# Altium PCB Project2.PcbDoc
Units mil, origin at the board's own origin, x right, y up, seen from the top; angles counter-clockwise.
Board outline 3937.01 x 1968.5 mil, 2 copper layers (Top Layer, Bottom Layer); 57 components, 56 nets, 242 pads, 48 vias.
Unrouted connection lines stored in the file: 7.
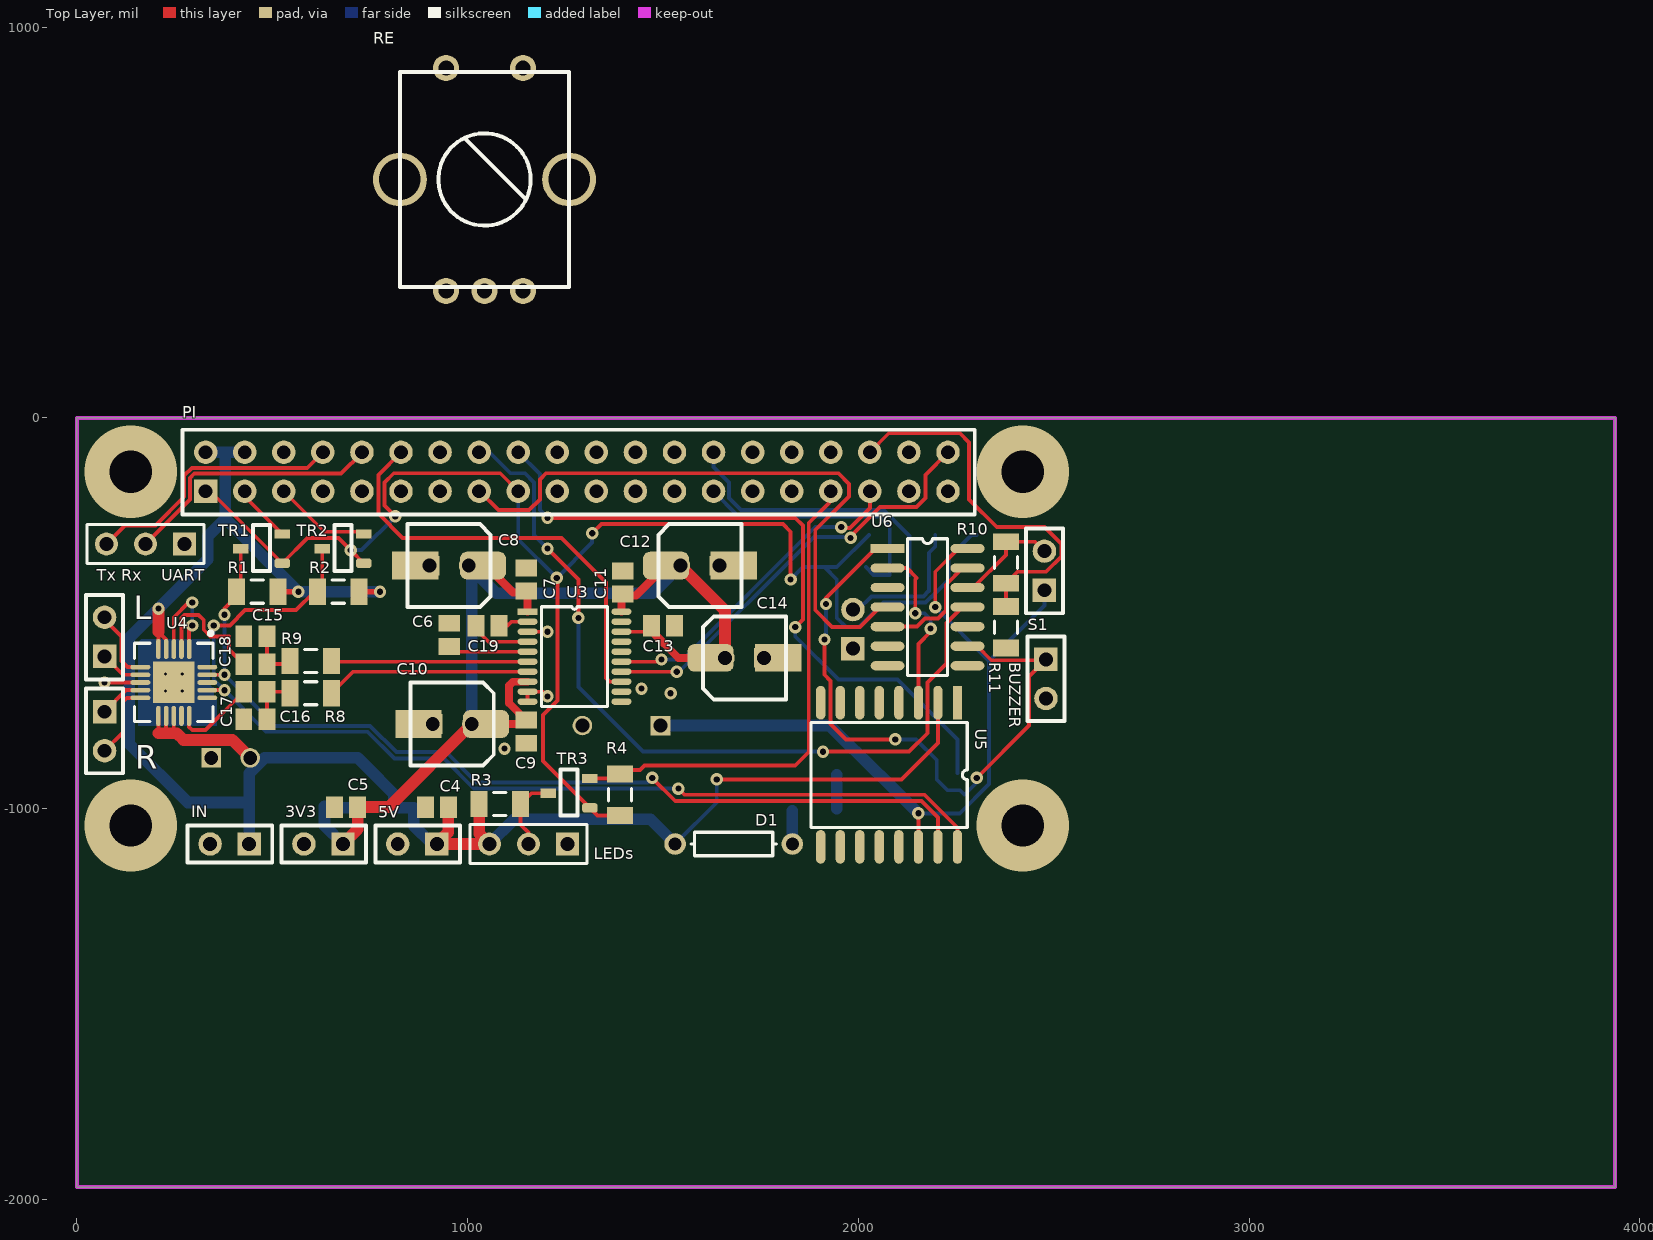
[diagram p0: Top Layer view]
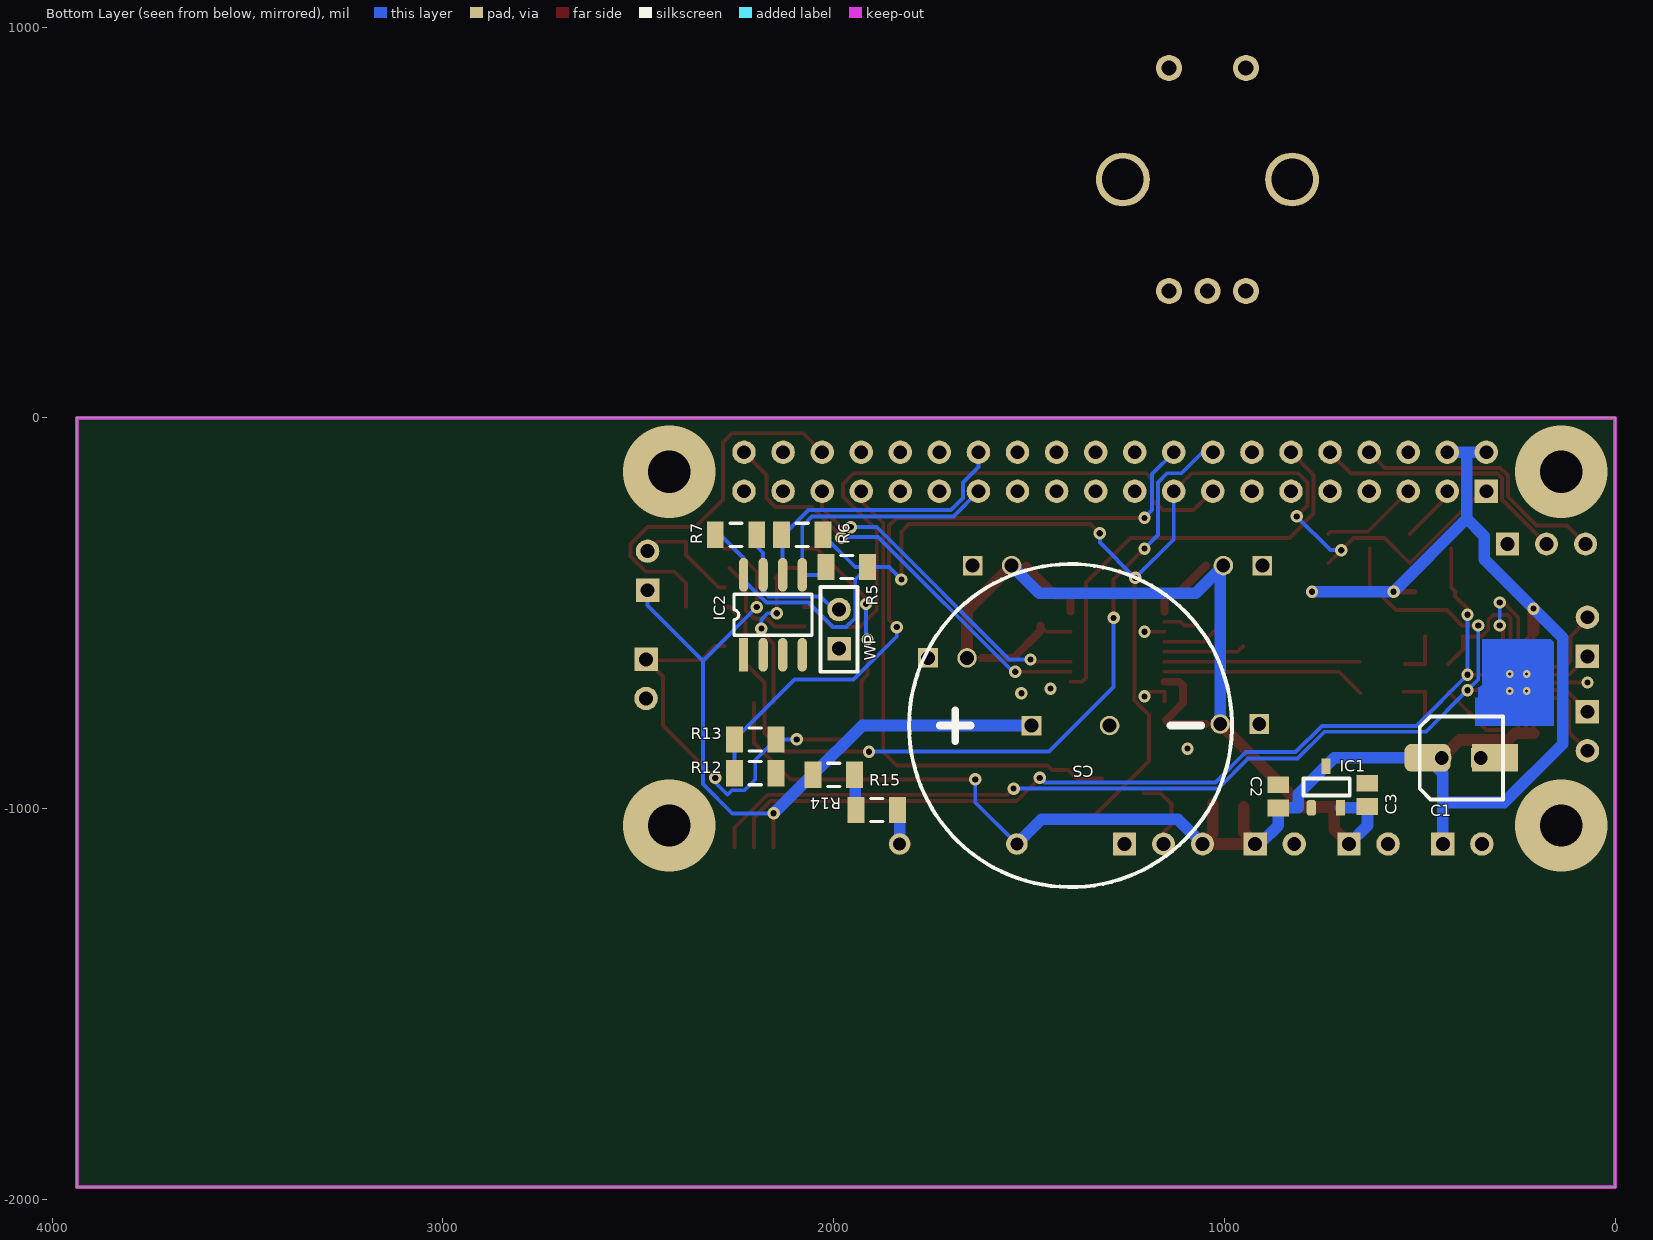
[diagram p1: Bottom Layer view, seen from below]

## Layer stack, top to bottom
Top Solder: solder mask 0.4, Solder Resist, Dk 3.5
Top Layer: signal copper 1.4
Dielectric 1: dielectric 12.6, FR-4, Dk 4.8
Bottom Layer: signal copper 1.4
Bottom Solder: solder mask 0.4, Solder Resist, Dk 3.5

## Board outline
0,-1968.5 0,0 3937.01,0 3937.01,-1968.5

## Design rules (kind name [scope] priority, off if disabled: settings)
Clearance [All] p1: gap=5
PolygonConnect [All] p1: connectstyle=Relief reliefconductorwidth=10 reliefentries=4 polygonreliefangle="90 Angle" airgapwidth=10
RoutingVias [All] p1: holewidth=28 width=50 viastyle="Through Hole" minholewidth=28 minwidth=50 maxholewidth=28 maxwidth=50
SolderMaskExpansion [All] p1: expansion=4
Width [All] p1: maxlimit=50 minlimit=10 preferedwidth=10 minimp=50.000000 maximp=50.000000 favimp=50.000000
30 further rules are at their usual default settings.

## Components (designator, comment, footprint, x,y, rotation, side; value= is the part's Value field where it differs from the comment)
3V3 "" HDR1X2 681.1,-1090.55 r180 top
5V "" HDR1X2 921.26,-1090.55 r180 top
BUZZER "" HDR1X2 2480.32,-618.11 r270 top
C1 "" "SMD CAP 6X5" 393.7,-870.08 r180 bottom
C2 "" C0805 862.2,-968.5 r270 bottom
C3 "" C0805 633.86,-964.57 r270 bottom
C4 "" C0805 921.26,-996.06 r0 top
C5 "" C0805 688.98,-996.06 r180 top
C6 "" C0805 952.76,-555.12 r270 top
C7 "" C0805 1149.61,-413.39 r90 top
C8 "" "SMD CAP 6X5" 952.76,-377.95 r180 top
C9 "" C0805 1149.61,-803.15 r270 top
C10 "" "SMD CAP 6X5" 960.63,-783.46 r180 top
C11 "" C0805 1397.64,-421.26 r270 top
C12 "" "SMD CAP 6X5" 1594.49,-377.95 r0 top
C13 "" C0805 1500,-531.5 r0 top
C14 "" "SMD CAP 6X5" 1708.66,-614.17 r0 top
C15 "" C0805 456.69,-559.06 r180 top
C16 "" C0805 456.69,-771.65 r180 top
C17 "" C0805 456.69,-700.79 r0 top
C18 "" C0805 456.69,-629.92 r0 top
C19 "" C0805 1051.18,-531.5 r180 top
CS "Supercap" SUPERCAP 1393.7,-787.4 r0 bottom
D1 "" AXIAL-0.3 1681.1,-1090.55 r0 top
IC1 "3v3" SOT-23A 740.16,-944.88 r180 bottom
IC2 "I²C SERIAL EEPROM" SOIC-8 2155.51,-503.94 r90 bottom
IN "" HDR1X2 440.94,-1090.55 r180 top
L "" HDR1X2 70.87,-610.24 r90 top
LEDs "WS2812" HDR1X3 1255.91,-1090.55 r180 top
PI "Raspberry Pi v2" HDR2X10 1279.53,-137.8 r90 top
R "" HDR1X2 70.87,-751.97 r270 top
R1 "" C1206 461.65,-444.92 r0 top
R2 "" C1206 669.29,-444.88 r0 top
R3 "" C1206 1082.68,-988.19 r180 top
R4 "" C1206 1389.76,-964.57 r270 top
R5 "" C1206 1966.54,-381.89 r180 bottom
R6 "" C1206 2080.71,-299.21 r180 bottom
R7 "" C1206 2250,-299.21 r0 bottom
R8 "" C1206 598.43,-704.72 r180 top
R9 "" C1206 598.43,-622.05 r180 top
R10 "" C1206 2377.95,-370.08 r90 top
R11 "" C1206 2377.95,-535.43 r90 top
R12 "" C1206 2200.79,-909.45 r0 bottom
R13 "" C1206 2200.79,-822.83 r0 bottom
R14 "" C1206 1889.76,-1003.94 r0 bottom
R15 "" C1206 2000,-913.39 r0 bottom
RE "RotaryEncoder" EC11E-WP 1043.31,610.24 r0 top
S1 "Alarm reset" HDR1X2 2476.38,-440.94 r90 top
TR1 "Level shifter" SOT-23A 472.44,-334.65 r90 top
TR2 "Level shifter" SOT-23A 681.1,-334.65 r90 top
TR3 "Level shifter" SOT-23A 1259.84,-960.63 r90 top
U3 "I²S DAC" TSSOP-20 1153.54,-496.06 r0 top
U4 "TPA2016D2" QFN20-TPA2016D2 248.03,-677.17 r270 top
U5 "DS3231 RTC" "DS3231 SO-16" 2078.74,-913.39 r270 top
U6 "NOR gates" SOIC-14 2177.17,-484.25 r0 top
UART "" HDR1X3 275.59,-322.83 r180 top
WP "Jumper" HDR1X2 1986.22,-590.55 r90 bottom

## Footprints (in the part's own frame and the unit in brackets; to place one, negate y for a bottom-side part, rotate by r counter-clockwise, add the part's x,y. Pads: shape width x height; smd on the part's side, far side on the other; paste and mask are expansions set on the pad)
AXIAL-0.3 [mm] "Axial Device, Thru-Hole; 2 Leads; 0.3 in Pin Spacing"
  round 1.4 hole 0.85: 1(-3.81,0) 2(3.81,0)
  silkscreen extent -2.77,-0.76 2.77,0.76
C0805 [mm] "Chip Capacitor, Body 2.0x1.3mm, IPC High Density"
  rect 1.1x1.4 smd: 1(-0.75,0) 2(0.75,0)
  body extent -1.1,-0.72 1.1,0.72, height 1.4
C1206 [mm] "Chip Capacitor, Body 3.2x1.6mm, IPC High Density"
  rect 1.1x1.7 smd: 1(-1.35,0) 2(1.35,0)
  silkscreen extent -0.4,-0.75 0.4,0.75, body extent -1.7,-0.9 1.7,0.9, height 1.3
"DS3231 SO-16" [mm]
  rect 2.2x0.6 smd: 1(-4.685,4.445)
  oval 2.2x0.6 smd: 2(-4.685,3.175) 3(-4.685,1.905) 4(-4.685,0.635) 5(-4.685,-0.635) 6(-4.685,-1.905) 7(-4.685,-3.175) 8(-4.685,-4.445) 9(4.685,-4.445) 10(4.685,-3.175) 11(4.685,-1.905) 12(4.685,-0.635) 13(4.685,0.635) 14(4.685,1.905) 15(4.685,3.175) 16(4.685,4.445)
  silkscreen extent -3.38,-5.08 3.41,5.08
EC11E-WP [mm] "With push button"
  round 3.5 hole 2.7: 0(-5.5,0) 0(5.5,0)
  round 1.7 hole 1: 1(-2.5,-7.25) 2(0,-7.25) 3(2.5,-7.25) 4(-2.5,7.25) 5(2.5,7.25)
  silkscreen extent -5.5,-7 5.5,7
HDR1X2 [mil] "2 Pin Header"
  rect 60x60 hole 35.43: 1(0,0)
  round 60 hole 35.43: 2(100,0)
  silkscreen extent -59,-47 157,47
HDR1X3 [mm] "Connector; Header; 3 Position"
  rect 1.5x1.5 hole 0.9: 1(0,0)
  round 1.5 hole 0.9: 2(2.54,0) 3(5.08,0)
  silkscreen extent -1.27,-1.27 6.35,1.27
HDR2X10 [mil] "20 pin Header"
  rect 60x60 hole 35.43: 1(-50,950)
  round 60 hole 35.43: 2(50,950) 3(-50,850) 4(50,850) 5(-50,750) 6(50,750) 7(-50,650) 8(50,650) 9(-50,550) 10(50,550) 11(-50,450) 12(50,450) 13(-50,350) 14(50,350) 15(-50,250) 16(50,250) 17(-50,150) 18(50,150) 19(-50,50) 20(50,50) 21(-50,-50) 22(50,-50) 23(-50,-150) 24(50,-150) 25(-50,-250) 26(50,-250) 27(-50,-350) 28(50,-350) 29(-50,-450) 30(50,-450) 31(-50,-550) 32(50,-550) 33(-50,-650) 34(50,-650) 35(-50,-750) 36(50,-750) 37(-50,-850) 38(50,-850) 39(-50,-950) 40(50,-950)
  silkscreen extent -109,-1019 107,1009
QFN20-TPA2016D2 [mm] "QFN, 20-Leads, Body 4,77x4,77mm, Pitch 0,50mm, Thermal Pad 2,70x2,70mm, IPC Low Density"
  rect 2.7x2.7 smd: 0(0,0)
  oct 1.3x0.3 smd: 1(-2.175,1)
  oval 1.3x0.3 smd: 2(-2.175,0.5) 3(-2.175,0) 4(-2.175,-0.5) 5(-2.175,-1) 11(2.175,-1) 12(2.175,-0.5) 13(2.175,0) 14(2.175,0.5) 15(2.175,1)
  oval 0.3x1.3 smd: 6(-1,-2.175) 7(-0.5,-2.175) 8(0,-2.175) 9(0.5,-2.175) 10(1,-2.175) 16(1,2.175) 17(0.5,2.175) 18(0,2.175) 19(-0.5,2.175) 20(-1,2.175)
  silkscreen extent -3.32,-2.55 2.55,2.55, body extent -2.4,-2.4 2.4,2.4, height 0.8
"SMD CAP 6X5" [mm]
  rrect50% 3x1.8 smd: 1(-2.2,0)
  round 1.27 hole 0.9: 1(-1.27,0)
  rect 1.27x1.27 hole 0.9: 2(1.27,0)
  rect 3x1.8 smd: 2(2.2,0)
  silkscreen extent -2.7,-2.7 2.7,2.7
SOIC-8 [mm]
  rect 2.2x0.6 smd: 1(-2.6,1.905)
  oval 2.2x0.6 smd: 2(-2.6,0.635) 3(-2.6,-0.635) 4(-2.6,-1.905) 5(2.6,-1.905) 6(2.6,-0.635) 7(2.6,0.635) 8(2.6,1.905)
  silkscreen extent -1.33,-2.54 1.34,2.54
SOIC-14 [mm]
  rect 2.2x0.6 smd: 1(-2.6,3.81)
  oval 2.2x0.6 smd: 2(-2.6,2.54) 3(-2.6,1.27) 4(-2.6,0) 5(-2.6,-1.27) 6(-2.6,-2.54) 7(-2.6,-3.81) 8(2.6,-3.81) 9(2.6,-2.54) 10(2.6,-1.27) 11(2.6,0) 12(2.6,1.27) 13(2.6,2.54) 14(2.6,3.81)
  silkscreen extent -1.3,-4.44 1.3,4.44
SOT-23A [mm]
  rrect50% 0.6x1 smd: 1(-0.95,-1.35)
  rect 0.6x1 smd: 2(0.95,-1.35) 3(0,1.35)
  silkscreen extent -1.45,-0.55 1.55,0.55
SUPERCAP [mm] "Supercap"
  rect 1.27x1.27 hole 0.9: 1(2.54,0)
  round 1.27 hole 0.9: 2(-2.54,0)
  silkscreen extent -10.5,-10.5 10.5,10.5
TSSOP-20 [mm]
  rect 1.3x0.4 smd: 1(0,0)
  oval 1.3x0.4 smd: 2(0,-0.65) 3(0,-1.3) 4(0,-1.95) 5(0,-2.6) 6(0,-3.25) 7(0,-3.9) 8(0,-4.55) 9(0,-5.2) 10(0,-5.85) 11(6.1,-5.85) 12(6.1,-5.2) 13(6.1,-4.55) 14(6.1,-3.9) 15(6.1,-3.25) 16(6.1,-2.6) 17(6.1,-1.95) 18(6.1,-1.3) 19(6.1,-0.65) 20(6.1,0)
  silkscreen extent 0.9,-6.18 5.2,0.33

## Part data
3V3 5V IN L R: library part "Header 2", "Header, 2-Pin"
BUZZER: library part Bell, "Electrical Bell"
C1 CS: library part "Cap Pol1", "Polarized Capacitor (Radial)"
C2 C3 C4 C5 C6 C7 C9 C11 C13 C15 C16 C17 C18 C19: library part Cap, "Capacitor"
C8 C10 C12 C14: library part "Cap Pol2", "Polarized Capacitor (Axial)"
D1: library part Diode, "Default Diode"
IC1: library part MCP1703, "Power regulator"
LEDs UART: library part "Header 3", "Header, 3-Pin"
PI: library part RaspberryPiV2, "Raspberry Pi v2 Header"
R1 R2 R3 R4 R5 R6 R7 R8 R9 R10 R11 R12 R13 R14 R15: library part Res2, "Resistor"
S1: library part SW-PB, "Switch"
TR1 TR2 TR3: library part AN10441, "Level Shifter"
U3: library part PCM5102A
U4: "I²C Audio Amplifier"
U5: library part DS3231, "RTC"
U6: library part 744002, "Dual 4-input NOR gate"

## Via types
v1: diameter 31.5, hole 15.75, Top Layer to Bottom Layer, tented both sides, 40 vias
v2: diameter 19.68, hole 7.87, Top Layer to Bottom Layer, 4 vias
v3: diameter 236.22, hole 108.27, Top Layer to Bottom Layer, 4 vias

## Nets (pads, with @x,y where several pads share a name; then routed paths per layer and width w, separated by ;. In a path a pad name is that pad's centre, name@x,y a point inside that pad or via, vN(x,y) a via of type N, cw(c..) or ccw(c..) an arc to the next point about the centre after c; other vN are vias at no path point)
3V3: 3V3.1 C3.2 C5.1 C7.1 C8.1 C9.1 C10.1 C11.2 C12.1 C13.1 C14.1 IC1.2 U3.1 U3.8 U3.18 U3.20 | length 2865.6
  Top Layer w10: U3.18 1454.72,-547.24 C13.1
  Top Layer w20: C10.1@1047.24,-783.46 1139.76,-783.46 C9.1 1106.3,-730.31 1106.3,-685.04 1116.14,-675.2 U3.8 ; C8.1@1047.24,-377.95 1116.14,-446.85 1153.54,-446.85 U3.1 ; U3.20 1393.7,-454.72 1431.1,-454.72 C12.1@1507.87,-377.95 ; C13.1 1470.47,-545.28 1539.37,-614.17 C14.1@1622.05,-614.17
  Top Layer w30: 3V3.1 718.5,-1053.15 C5.1 798.03,-996.06 C10.1@1010.63,-783.46 ; C12.1@1544.49,-377.95 1658.66,-492.13 C14.1@1658.66,-614.17
  Bottom Layer w30: C3.2 633.86,-1043.31 3V3.1 ; C3.2@637.8,-998.03 IC1.2 ; C8.1@1002.76,-377.95 C8.1@1010.63,-385.83 ; C10.1@1010.63,-783.46 C8.1@1010.63,-385.83 ; C12.1@1544.49,-377.95 1473.62,-448.82 1073.62,-448.82 C8.1@1010.63,-385.83
3V3PI: IC2.8 PI.1 PI.17 R4.2 R5.2 R6.2 R7.2 TR1.1 TR2.1 TR3.1 | length 3846.1
  Top Layer w10: PI.1 341.34,-187.8 TR1.1 590.55,-307.09 669.29,-307.09 v1(700.79,-338.58) TR2.1 ; v1(814.96,-251.97) 787.4,-224.41 787.4,-165.35 811.02,-141.73 1083.46,-141.73 PI.17 ; v1(1228.35,-409.45) 1230.47,-411.57 1230.47,-723.26 1192.91,-760.82 1192.91,-877.95 TR3.1 1332.68,-1017.72 R4.2 ; v1(1318.9,-295.28) 1342.52,-271.65 1807.09,-271.65 1826.77,-291.34 v1(1826.77,-413.39)
  Bottom Layer w10: v1(700.79,-338.58) 728.35,-338.58 v1(814.96,-251.97) ; PI.17 1129.53,-310.63 v1(1228.35,-409.45) 1318.9,-318.9 v1(1318.9,-295.28) ; v1(1826.77,-413.39) 1858.27,-381.89 R5.2 ; R6.2 1944.88,-381.89 R5.2 ; R7.2 2289.37,-299.21 2230.51,-358.07 IC2.8 2230.51,-415.16 2187.17,-458.5 2186.19,-458.5 2172.25,-472.44 2064.96,-472.44 2001.97,-535.43 1968.5,-535.43 1944.88,-511.81 1944.88,-413.39 R5.2
5V: 5V.1 C1.1 C2.2 C4.2 D1.1 IC1.3 IN.1 LEDs.3 PI.2 PI.4 R1.2 R2.2 R3.2 U4.4 U4.5 U4.11 U4.12 U4.13 U5.2 | length 5058.4
  Top Layer w10: 208.66,-807.09 U4.11 ; U4.5 208.66,-547.24 228.35,-566.93 U4.4 ; 228.35,-807.09 U4.12 ; 248.03,-807.09 U4.13 ; v1(1637.8,-925.2) 2110.24,-925.2 2203.74,-831.69 U5.2
  Top Layer w15: R1.2 v1(566.93,-444.88) ; R2.2 v1(775.59,-444.88)
  Top Layer w30: 208.66,-807.09 248.03,-807.09 255.69,-807.09 272.81,-824.21 397.83,-824.21 C1.1@443.7,-870.08 ; 208.66,-547.24 v1(208.66,-488.19) ; C4.2 950.79,-1061.02 5V.1 LEDs.3 1029.53,-1064.17 R3.2
  Bottom Layer w10: D1.1 1637.8,-983.86 v1(1637.8,-925.2)
  Bottom Layer w30: PI.2 377.95,-87.8 ; PI.4 377.95,-87.8 ; 437.01,-984.25 283.46,-984.25 133.86,-834.65 133.86,-562.99 334.65,-362.2 334.65,-302.36 379.53,-257.48 ; IN.1 440.94,-909.45 480.31,-870.08 718.5,-870.08 IC1.3 811.02,-962.6 811.02,-998.03 C2.2 862.2,-1043.31 909.45,-1090.55 5V.1 ; v1(775.59,-444.88) v1(566.93,-444.88) 379.53,-257.48 ; LEDs.3 1118.9,-1027.56 1468.11,-1027.56 D1.1 ; 377.95,-87.8 379.53,-89.37 379.53,-257.48
5VBCK: CS.1 R15.2 S1.1 U5.14 U6.14 | length 1998.4
  Top Layer w10: U5.14 v1(2153.74,-1012.01) ; v1(2196.85,-484.25) 2196.85,-393.7 2256.3,-334.25 U6.14
  Bottom Layer w10: v1(2153.74,-1012.01) 2259.65,-1012.01 2334.65,-937.01 2334.65,-622.05 ; v1(2196.85,-484.25) 2334.65,-622.05 ; S1.1 2476.38,-480.32 2334.65,-622.05
  Bottom Layer w30: CS.1 1927.17,-787.4 R15.2 2055.12,-913.39 v1(2153.74,-1012.01)
"BCM 16": PI.36 R10.1 R11.2 | length 973.8
  Top Layer w10: PI.36 2077.95,-39.37 2259.84,-39.37 2283.46,-62.99 2283.46,-208.66 2354.33,-279.53 2476.38,-279.53 2519.68,-322.83 2519.68,-354.33 2480.32,-393.7 2407.48,-393.7 R10.1 R11.2
"BCM 17": PI.11
"BCM 22": PI.15 U6.4 | length 1630.3
  Top Layer w10: PI.15 1030.32,-187.8 1078.74,-236.22 1157.48,-236.22 1185.04,-208.66 1185.04,-157.48 1200.79,-141.73 1948.82,-141.73 1976.38,-169.29 1976.38,-200.79 1889.76,-287.4 1889.76,-492.13 1933.07,-535.43 2003.94,-535.43 2055.12,-484.25 U6.4
"BCM 23": PI.16 U6.11 | length 2097.5
  Top Layer w10: v1(1204.72,-334.65) 1283.46,-413.39 v1(1283.46,-511.81) ; v1(1909.45,-854.33) 2129.92,-854.33 2177.17,-807.09 2177.17,-677.17 2226.22,-628.11 2226.22,-525.22 2267.19,-484.25 U6.11
  Bottom Layer w10: PI.16 1056.3,-87.8 1110.24,-141.73 1146.42,-141.73 1169.53,-164.84 1169.53,-299.45 v1(1204.72,-334.65) ; v1(1283.46,-511.81) 1283.46,-688.98 1448.82,-854.33 v1(1909.45,-854.33)
"BCM 24": PI.18 R12.2 R13.2 | length 1763.8
  Top Layer w10: v1(1204.72,-255.91) 1838.58,-255.91 1858.27,-275.59 1858.27,-515.75 v1(1838.58,-535.43)
  Bottom Layer w10: PI.18 1185.04,-143.31 1185.04,-236.22 v1(1204.72,-255.91) ; v1(1838.58,-535.43) 1838.58,-559.06 1948.82,-669.29 2100.39,-669.29 R13.2 R12.2
"BCM 25": PI.22 RE.4
"BCM 26": PI.37 RE.1
"BCM 27": PI.13 RE.3
"CE 0": PI.24
"CE 1": PI.26
CLK: PI.12 U3.13 | length 1124.4
  Top Layer w10: PI.12 771.65,-145.67 771.65,-245.07 833.67,-307.09 1240.16,-307.09 1354.33,-421.26 1354.33,-665.35 1364.17,-675.2 U3.13
DIN: PI.38
DOUT: PI.40 U3.14 | length 1107.7
  Top Layer w10: U3.14 v1(1535.43,-649.61) ; v1(1980.32,-307.09) 1980.32,-303.15 2055.67,-227.8 2148.58,-227.8 2171.65,-204.72 2171.65,-145.67 PI.40
  Bottom Layer w10: v1(1535.43,-649.61) 1540.9,-649.61 1886.1,-304.4 1886.97,-305.28 1978.5,-305.28 v1(1980.32,-307.09)
FS: PI.35 U3.15 | length 828.8
  Top Layer w10: U3.15 1490.16,-624.02 v1(1496.06,-618.11) ; v1@1969.65,-281.34 1978.5,-281.34 2011.81,-248.03 2029.53,-230.31 PI.35
  Bottom Layer w10: v1(1496.06,-618.11) 1551.18,-618.11 1889.76,-279.53 v1(1956.26,-279.53)
GND: 3V3.2 5V.2 BUZZER.2 C1.2 C2.1 C3.1 C4.1 C5.2 C6.1 C7.2 C8.2 C9.2 C10.2 C11.1 C12.2 C13.2 C14.2 C15.2 C16.2 CS.2 IC1.1 IC2.1 IC2.2 IC2.3 IC2.4 IN.2 LEDs.1 PI.6 PI.9 PI.14 PI.20 PI.25 PI.30 PI.34 PI.39 R11.1 R12.1 RE.2 RE.5 U3.3 U3.9 U3.10 U3.11 U3.12 U3.16 U3.19 U4.1 U4.3 U4.8 U5.13 U6.3 U6.7 U6.10 UART.1 WP.1 | length 490.9
  Top Layer w10: v1(70.87,-677.17) U4.8 ; U4.3 248.03,-510.28 285.87,-472.44 v1(295.28,-472.44) ; U4.1 287.4,-539.37 v1(295.28,-531.5) ; U3.10 U3.9 1192.91,-700.79 v1(1204.72,-712.6) ; U3.3 v1(1204.72,-547.24)
  Bottom Layer w10: v1(295.28,-531.5) v1(295.28,-472.44)
  other v1: 1094.49,-846.46 1519.68,-704.72 1444.88,-692.91
  other v3: 137.8,-1043.31 2421.26,-1043.31 137.8,-137.8 2421.26,-137.8
"GPCLK 0": PI.7
"GPCLK 1": PI.29
"GPCLK 2": PI.31
MISO: PI.21
MOSI: PI.19
NetBUZZER_1: BUZZER.1 R13.1 U6.1 U6.9 | length 1625.9
  Top Layer w10: v1(1913.39,-566.93) 1913.39,-657.48 1929.13,-673.23 1929.13,-783.46 1968.5,-822.83 v1(2094.49,-822.83) ; v1(1917.32,-476.38) 1917.32,-460.63 2043.7,-334.25 U6.1 ; U6.9 2304.36,-584.25 2340.35,-620.24 2478.19,-620.24 2437.01,-661.42 2437.01,-787.4 v1(2303.15,-921.26)
  Bottom Layer w10: v1@1917.32,-566.93 v1(1917.32,-476.38) ; v1(2094.49,-822.83) R13.1@2144.36,-822.83 ; R13.1 2200.79,-875.98 2200.79,-925.56 2228.14,-952.91 2260,-952.91 2271.65,-964.57 2303.15,-933.07 v1(2303.15,-921.26)
NetC6_2: C6.2 U3.5 | length 206.5
  Top Layer w10: C6.2 966.54,-598.43 U3.5
NetC15_1: C15.1 C18.2 R9.2 | length 122
  Top Layer w10: C15.1 C18.2 R9.2@537.4,-629.92
NetC16_1: C16.1 C17.2 R8.2 | length 126
  Top Layer w10: C16.1 C17.2 R8.2@541.34,-700.79
NetC17_1: C17.1 U4.15 | length 212.3
  Top Layer w10: U4.15 287.4,-791.34 295.28,-799.21 328.74,-799.21 C17.1
NetC18_1: C18.1 U4.2 | length 328.6
  Top Layer w10: U4.2 267.72,-511.81 275.59,-503.94 311.02,-503.94 324.65,-517.56 324.65,-542.16 341.54,-559.06 389.76,-559.06 389.76,-592.52 C18.1
NetC19_1: C19.1 U3.2 | length 76.9
  Top Layer w10: C19.1 1102.36,-531.5 1112.2,-521.65 U3.2
NetC19_2: C19.2 U3.4 | length 154.8
  Top Layer w10: C19.2 1021.65,-541.34 1053.15,-572.83 U3.4
NetD1_2: D1.2 R14.1 | length 85
  Bottom Layer w30: D1.2 R14.1@1831.1,-1005.51
NetIC2_5: IC2.5 PI.27 R5.1 | length 681.3
  Bottom Layer w10: PI.27 1693.7,-251.97 2055.12,-251.97 2080.51,-277.36 IC2.5 2039.37,-401.57 R5.1
NetIC2_6: IC2.6 PI.28 R6.1 | length 734.8
  Bottom Layer w10: PI.28 1629.53,-125.59 1669.53,-165.59 1669.53,-204.36 1669.29,-204.6 1669.29,-205.47 1700.04,-236.22 2064.17,-236.22 2130.51,-302.56 IC2.6
NetIC2_7: IC2.7 R7.1 WP.2 | length 364.8
  Bottom Layer w10: WP.2 1999.61,-490.55 2033.46,-456.69 2166.78,-456.69 2179.97,-443.5 2180.51,-443.5 IC2.7 2180.51,-345.08 2196.85,-328.74 R7.1
NetL_1: L.1 U4.7 | length 111.1
  Top Layer w10: L.1 118.11,-657.48 U4.7
NetL_2: L.2 U4.6 | length 184.5
  Top Layer w10: L.2 70.87,-515.75 114.17,-559.06 114.17,-622.05 129.92,-637.8 U4.6
NetLEDs_2: LEDs.2 R3.1 TR3.3 | length 193
  Top Layer w10: LEDs.2 1155.91,-1061.42 1135.83,-1041.34 R3.1 1163.39,-960.63 TR3.3
NetR1_1: R1.1 TR1.3 U4.19 U5.15 | length 2447.1
  Top Layer w10: U4.19 v1(377.95,-657.48) ; v1(377.95,-503.94) 377.95,-488.19 409.45,-456.69 409.45,-445.87 R1.1 419.29,-434.13 TR1.3 ; v1(1472.44,-921.26) 1531.5,-980.32 2161.42,-980.32 2203.74,-1022.64 U5.15
  Bottom Layer w10: v1(377.95,-503.94) v1(377.95,-657.48) 508.62,-788.15 750.31,-788.15 817.69,-855.54 945.34,-855.54 1022.88,-933.07 1460.63,-933.07 v1(1472.44,-921.26)
NetR2_1: R2.1 TR2.3 U4.17 U5.16 | length 2709.9
  Top Layer w10: U4.17 v1(377.95,-696.85) ; v1(350.39,-531.5) 391.37,-531.5 430.74,-492.13 561.02,-492.13 608.27,-444.88 R2.1 ; R2.1@612.2,-444.88 627.95,-429.13 TR2.3 ; v1(1539.37,-948.82) 1555.12,-964.57 2169.29,-964.57 2253.74,-1049.02 U5.16
  Bottom Layer w10: v1(350.39,-531.5) 350.39,-669.29 v1(377.95,-696.85) 484.25,-803.15 744.09,-803.15 813.15,-872.2 939.13,-872.2 1015.75,-948.82 v1(1539.37,-948.82)
NetR8_1: R8.1 U3.7 | length 524.8
  Top Layer w10: R8.1 706.69,-649.61 U3.7
NetR9_1: R9.1 U3.6 | length 500
  Top Layer w10: R9.1@653.54,-624.02 U3.6
NetR10_2: R10.2 S1.2 U6.12 | length 275
  Top Layer w10: U6.12 2294.09,-434.25 2377.95,-350.39 R10.2 2452.36,-316.93 S1.2
NetR14_2: R14.2 R15.1 | length 86.6
  Bottom Layer w30: R14.2@1944.88,-1000 R15.1@1944.88,-913.39
NetR_1: R.1 U4.9 | length 114.4
  Top Layer w10: R.1 125.98,-696.85 U4.9
NetR_2: R.2 U4.10 | length 193.8
  Top Layer w10: R.2 118.11,-804.72 118.11,-725.94 127.51,-716.54 U4.10
NetU5_3: U5.3 U6.2 | length 449.5
  Top Layer w10: U6.2 2124.41,-384.25 2149.61,-409.45 2145.67,-413.39 v1(2145.67,-500) ; U5.3 2153.74,-578.54 2185.04,-547.24 v1(2185.03,-539.37)
  Bottom Layer w10: v1(2145.67,-500) 2169.29,-500 2185.04,-515.75 v1(2185.03,-539.37)
NetU6_5: U6.5 U6.13 | length 293.2
  Top Layer w10: U6.5 2149.81,-534.25 2170.44,-513.62 2203.89,-513.62 2224.41,-493.11 2224.41,-427.03 U6.13@2267.19,-384.25
"PWM 0": PI.32
"PWM 1": PI.33 R4.1 TR3.2 | length 1279.1
  Top Layer w10: TR3.2 1377.95,-923.23 R4.1 1399.61,-901.57 1440.94,-901.57 1452.76,-889.76 1838.58,-889.76 1873.27,-855.08 1873.27,-269.38 1925.2,-217.45 1925.2,-192.13 PI.33
RX: PI.10 UART.2 | length 684.6
  Top Layer w10: UART.2 289.53,-208.9 289.53,-153.65 300.39,-142.8 676.1,-142.8 729.53,-89.37 PI.10
SCK: PI.5 TR2.2 | length 250.1
  Top Layer w10: PI.5 633.07,-291.34 728.35,-291.34 TR2.2
SCLK: PI.23
SDA: PI.3 TR1.2 | length 149.2
  Top Layer w10: PI.3 429.53,-201.18 TR1.2
TX: PI.8 UART.3 | length 683.2
  Top Layer w10: UART.3 122.83,-275.59 200.79,-275.59 274.53,-201.85 274.53,-147.44 294.17,-127.8 589.53,-127.8 PI.8
pads on no net: RE.0 U3.17 U4.0 U4.14 U4.16 U4.18 U4.20 U5.1 U5.4 U5.5 U5.6 U5.7 U5.8 U5.9 U5.10 U5.11 U5.12 U6.6 U6.8
copper on no net:
  other v2: 226.38,-698.82 269.68,-698.82 226.38,-655.51 269.68,-655.51

## Polygon pours and split planes (outlines as drawn)
GND on Top Layer "NONET_L01_P000" (solid, remove dead copper, shelved, pour order 0): 0,-1968.5 0,0 3937.01,0 3937.01,-1968.5
GND on Bottom Layer "NONET_L02_P002" (solid, remove dead copper, shelved, pour order 2): 0,-1968.5 0,0 3937.01,0 3937.01,-1968.5

## Keep-outs
Keep-Out Layer:
  the board outline again, w10

## Other copper
Top Layer:
  pour cut-out: 129.92,-559.06 366.14,-559.06 366.14,-795.28 129.92,-795.28
Bottom Layer:
  region: 157.48,-787.4 358.27,-787.4 358.27,-716.54 350.39,-716.54 350.39,-688.98 346.46,-688.98 338.58,-681.1 340.2,-679.49 340.2,-566.93 165.29,-566.93 157.48,-574.74
  pour cut-out: 366.14,-559.06 366.14,-795.28 129.92,-795.28 129.92,-559.06

## Silkscreen, mask and mechanical layers (free items; w line width, h text height)
Top Overlay:
  text "Tx Rx" at 51.18,-417.32 h30
Mechanical 1:
  the board outline again, w10